# EAGLE board CT_schematic (EAGLE 7.6.0)

Size 184.61 x 80 mm. Coordinates in mm from the lower left corner, seen from the top.
Outline: 84.61,0 184.61,0 184.61,80 84.61,80 84.61,0
Copper layers (1*16): Top 0.035mm / dielectric 1.5mm / Bottom 0.035mm
Design rules "default": minimum track width 10mil, minimum drill 24mil, track to track 8mil, track to pad 8mil, pad to pad 8mil, via to via 8mil, smd to smd 8mil, copper to edge 40mil, drill to drill 8mil, minimum pad ring 10mil, minimum via ring 8mil, stop-mask expansion 4mil, vias tented up to drill 0mil, thermal gap 10mil

## Footprints (pad centres in the part's own frame; a part is rotated, then mirrored left to right if it is on the bottom)
C0402 = smd 0.5 x 0.5: 1 -0.508,0; 2 0.508,0
C0603 = smd 0.8 x 0.8: 1 -0.762,0; 2 0.762,0
C0805 = smd 1.2 x 1.3: 1 -1.016,0; 2 1.016,0
C1210 = smd 1.2 x 2.5: 1 -1.524,0; 2 1.524,0
C1206 = smd 1.3 x 1.6: 1 -1.524,0; 2 1.524,0
R0603 = smd 0.8 x 0.8: 1 -0.762,0; 2 0.762,0
2220 = smd 1.85 x 5.5: 1 -2.55,0; 2 2.55,0
EXV-9H = smd 3.505 x 1.676: 1 -2.857,0; 2 2.857,0
IND_PM3316 = smd 2.921 x 2.794: 1 -5.144,0; 2 5.144,0
DR1040 = smd 1.6 x 3.2: 1 -4.458,0; 2 4.458,0
WE-HCI_7030/7040/7050 = smd 2.5 x 3: 1 -2.45,0; 2 2.45,0
PJ-037B_PACKAGE = drill 3.7 square: 1 12,0 | drill 3.2 square: 2 6,0
BFBGA-684 = smd 0.533 x 0.533: A1 -10.8,10.8; A2 -10,10.8; A3 -9.2,10.8; A4 -8.4,10.8; A5 -7.6,10.8; A6 -6.8,10.8; A7 -6,10.8; A8 -5.2,10.8; A9 -4.4,10.8; A10 -3.6,10.8; A11 -2.8,10.8; A12 -2,10.8; A13 -1.2,10.8; A14 -0.4,10.8; A15 0.4,10.8; A16 1.2,10.8; A17 2,10.8; A18 2.8,10.8; A19 3.6,10.8; A20 4.4,10.8; A21 5.2,10.8; A22 6,10.8; A23 6.8,10.8; A24 7.6,10.8; A25 8.4,10.8; A26 9.2,10.8; A27 10,10.8; A28 10.8,10.8; AA1 -10.8,-5.2; AA2 -10,-5.2; AA3 -9.2,-5.2; AA4 -8.4,-5.2; AA5 -7.6,-5.2; AA6 -6.8,-5.2; AA7 -6,-5.2; AA8 -5.2,-5.2; AA9 -4.4,-5.2; AA10 -3.6,-5.2; AA11 -2.8,-5.2; AA12 -2,-5.2; AA13 -1.2,-5.2; AA14 -0.4,-5.2; AA15 0.4,-5.2; AA16 1.2,-5.2; AA17 2,-5.2; AA18 2.8,-5.2; AA19 3.6,-5.2; AA20 4.4,-5.2; AA21 5.2,-5.2; AA22 6,-5.2; AA23 6.8,-5.2; AA24 7.6,-5.2; AA25 8.4,-5.2; AA26 9.2,-5.2; AA27 10,-5.2; AA28 10.8,-5.2; AB1 -10.8,-6; AB2 -10,-6; AB6 -6.8,-6; AB8 -5.2,-6; AB9 -4.4,-6; AB10 -3.6,-6; AB11 -2.8,-6; AB12 -2,-6; AB13 -1.2,-6; AB14 -0.4,-6; AB15 0.4,-6; AB16 1.2,-6; AB17 2,-6; AB18 2.8,-6; AB19 3.6,-6; AB20 4.4,-6; AB21 5.2,-6; AB23 6.8,-6; AB27 10,-6; AB28 10.8,-6; AC1 -10.8,-6.8; AC2 -10,-6.8; AC3 -9.2,-6.8; AC4 -8.4,-6.8; AC5 -7.6,-6.8; AC7 -6,-6.8; AC8 -5.2,-6.8; AC9 -4.4,-6.8; AC10 -3.6,-6.8; AC11 -2.8,-6.8; AC12 -2,-6.8; AC13 -1.2,-6.8; AC14 -0.4,-6.8; AC15 0.4,-6.8; AC16 1.2,-6.8; AC17 2,-6.8; AC18 2.8,-6.8; AC19 3.6,-6.8; AC20 4.4,-6.8; AC21 5.2,-6.8; AC22 6,-6.8; AC24 7.6,-6.8; AC25 8.4,-6.8; AC26 9.2,-6.8; AC27 10,-6.8; AC28 10.8,-6.8; AD1 -10.8,-7.6; AD2 -10,-7.6; AD3 -9.2,-7.6; AD4 -8.4,-7.6; AD6 -6.8,-7.6; AD8 -5.2,-7.6; AD9 -4.4,-7.6; AD11 -2.8,-7.6; AD12 -2,-7.6; AD14 -0.4,-7.6; AD15 0.4,-7.6; AD17 2,-7.6; AD18 2.8,-7.6; AD20 4.4,-7.6; AD21 5.2,-7.6; AD23 6.8,-7.6; AD25 8.4,-7.6; AD26 9.2,-7.6; AD27 10,-7.6; AD28 10.8,-7.6; AE1 -10.8,-8.4; AE2 -10,-8.4; AE3 -9.2,-8.4; AE5 -7.6,-8.4; AE6 -6.8,-8.4; AE8 -5.2,-8.4; AE9 -4.4,-8.4; AE11 -2.8,-8.4; AE12 -2,-8.4; AE14 -0.4,-8.4; AE15 0.4,-8.4; AE17 2,-8.4; AE18 2.8,-8.4; AE20 4.4,-8.4; AE21 5.2,-8.4; AE23 6.8,-8.4; AE24 7.6,-8.4; AE26 9.2,-8.4; AE27 10,-8.4; AE28 10.8,-8.4; AF1 -10.8,-9.2; AF2 -10,-9.2; AF3 -9.2,-9.2; AF4 -8.4,-9.2; AF5 -7.6,-9.2; AF6 -6.8,-9.2; AF8 -5.2,-9.2; AF9 -4.4,-9.2; AF11 -2.8,-9.2; AF12 -2,-9.2; AF14 -0.4,-9.2; AF15 0.4,-9.2; AF17 2,-9.2; AF18 2.8,-9.2; AF20 4.4,-9.2; AF21 5.2,-9.2; AF23 6.8,-9.2; AF24 7.6,-9.2; AF25 8.4,-9.2; AF26 9.2,-9.2; AF27 10,-9.2; AF28 10.8,-9.2; AG1 -10.8,-10; AG2 -10,-10; AG3 -9.2,-10; AG4 -8.4,-10; AG5 -7.6,-10; AG6 -6.8,-10; AG7 -6,-10; AG8 -5.2,-10; AG9 -4.4,-10; AG10 -3.6,-10; AG11 -2.8,-10; AG12 -2,-10; AG13 -1.2,-10; AG14 -0.4,-10; AG15 0.4,-10; AG16 1.2,-10; AG17 2,-10; AG18 2.8,-10; AG19 3.6,-10; AG20 4.4,-10; AG21 5.2,-10; AG22 6,-10; AG23 6.8,-10; AG24 7.6,-10; AG25 8.4,-10; AG26 9.2,-10; AG27 10,-10; AG28 10.8,-10; AH1 -10.8,-10.8; AH2 -10,-10.8; AH3 -9.2,-10.8; AH4 -8.4,-10.8; AH5 -7.6,-10.8; AH6 -6.8,-10.8; AH7 -6,-10.8; AH8 -5.2,-10.8; AH9 -4.4,-10.8; AH10 -3.6,-10.8; AH11 -2.8,-10.8; AH12 -2,-10.8; AH13 -1.2,-10.8; AH14 -0.4,-10.8; AH15 0.4,-10.8; AH16 1.2,-10.8; AH17 2,-10.8; AH18 2.8,-10.8; AH19 3.6,-10.8; AH20 4.4,-10.8; AH21 5.2,-10.8; AH22 6,-10.8; AH23 6.8,-10.8; AH24 7.6,-10.8; AH25 8.4,-10.8; AH26 9.2,-10.8; AH27 10,-10.8; AH28 10.8,-10.8; B1 -10.8,10; B2 -10,10; B3 -9.2,10; B4 -8.4,10; B5 -7.6,10; B6 -6.8,10; B7 -6,10; B8 -5.2,10; B9 -4.4,10; B10 -3.6,10; B11 -2.8,10; B12 -2,10; B13 -1.2,10; B14 -0.4,10; B15 0.4,10; B16 1.2,10; B17 2,10; B18 2.8,10; B19 3.6,10; B20 4.4,10; B21 5.2,10; B22 6,10; B23 6.8,10; B24 7.6,10; B25 8.4,10; B26 9.2,10; B27 10,10; B28 10.8,10; C1 -10.8,9.2; C2 -10,9.2; C3 -9.2,9.2; C4 -8.4,9.2; C5 -7.6,9.2; C6 -6.8,9.2; C8 -5.2,9.2; C9 -4.4,9.2; C11 -2.8,9.2; C12 -2,9.2; C14 -0.4,9.2; C15 0.4,9.2; C17 2,9.2; C18 2.8,9.2; C20 4.4,9.2; C21 5.2,9.2; C23 6.8,9.2; C24 7.6,9.2; C25 8.4,9.2; C26 9.2,9.2; C27 10,9.2; C28 10.8,9.2; D1 -10.8,8.4; D2 -10,8.4; D3 -9.2,8.4; D5 -7.6,8.4; D6 -6.8,8.4; D8 -5.2,8.4; D9 -4.4,8.4; D11 -2.8,8.4; D12 -2,8.4; D14 -0.4,8.4; D15 0.4,8.4; D17 2,8.4; D18 2.8,8.4; D20 4.4,8.4; D21 5.2,8.4; D23 6.8,8.4; D24 7.6,8.4; D26 9.2,8.4; D27 10,8.4; D28 10.8,8.4; E1 -10.8,7.6; E2 -10,7.6; E3 -9.2,7.6; E4 -8.4,7.6; E6 -6.8,7.6; E8 -5.2,7.6; E9 -4.4,7.6; E11 -2.8,7.6; E12 -2,7.6; E14 -0.4,7.6; E15 0.4,7.6; E17 2,7.6; E18 2.8,7.6; E20 4.4,7.6; E21 5.2,7.6; E23 6.8,7.6; E25 8.4,7.6; E26 9.2,7.6; E27 10,7.6; E28 10.8,7.6; F1 -10.8,6.8; F2 -10,6.8; F3 -9.2,6.8; F4 -8.4,6.8; F5 -7.6,6.8; F7 -6,6.8; F8 -5.2,6.8; F9 -4.4,6.8; F10 -3.6,6.8; F11 -2.8,6.8; F12 -2,6.8; F13 -1.2,6.8; F14 -0.4,6.8; F15 0.4,6.8; F16 1.2,6.8; F17 2,6.8; F18 2.8,6.8; F19 3.6,6.8; F20 4.4,6.8; F21 5.2,6.8; F22 6,6.8; F24 7.6,6.8; F25 8.4,6.8; F26 9.2,6.8; F27 10,6.8; F28 10.8,6.8; G1 -10.8,6; G2 -10,6; G6 -6.8,6; G8 -5.2,6; G9 -4.4,6; G10 -3.6,6; G11 -2.8,6; G12 -2,6; G13 -1.2,6; G14 -0.4,6; G15 0.4,6; G16 1.2,6; G17 2,6; G18 2.8,6; G19 3.6,6; G20 4.4,6; G21 5.2,6; G23 6.8,6; G27 10,6; G28 10.8,6; H1 -10.8,5.2; H2 -10,5.2; H3 -9.2,5.2; H4 -8.4,5.2; H5 -7.6,5.2; H6 -6.8,5.2; H7 -6,5.2; H8 -5.2,5.2; H9 -4.4,5.2; H10 -3.6,5.2; H11 -2.8,5.2; H12 -2,5.2; H13 -1.2,5.2; H14 -0.4,5.2; H15 0.4,5.2; H16 1.2,5.2; H17 2,5.2; H18 2.8,5.2; H19 3.6,5.2; H20 4.4,5.2; H21 5.2,5.2; H22 6,5.2; H23 6.8,5.2; H24 7.6,5.2; H25 8.4,5.2; H26 9.2,5.2; H27 10,5.2; H28 10.8,5.2; J1 -10.8,4.4; J2 -10,4.4; J3 -9.2,4.4; J4 -8.4,4.4; J5 -7.6,4.4; J6 -6.8,4.4; J7 -6,4.4; J10 -3.6,4.4; J11 -2.8,4.4; J12 -2,4.4; J13 -1.2,4.4; J14 -0.4,4.4; J15 0.4,4.4; J16 1.2,4.4; J17 2,4.4; J18 2.8,4.4; J19 3.6,4.4; J22 6,4.4; J23 6.8,4.4; J24 7.6,4.4; J25 8.4,4.4; J26 9.2,4.4; J27 10,4.4; J28 10.8,4.4; K1 -10.8,3.6; K2 -10,3.6; K6 -6.8,3.6; K7 -6,3.6; K9 -4.4,3.6; K10 -3.6,3.6; K11 -2.8,3.6; K12 -2,3.6; K13 -1.2,3.6; K14 -0.4,3.6; K15 0.4,3.6; K16 1.2,3.6; K17 2,3.6; K18 2.8,3.6; K19 3.6,3.6; K20 4.4,3.6; K22 6,3.6; K23 6.8,3.6; K27 10,3.6; K28 10.8,3.6; L1 -10.8,2.8; L2 -10,2.8; L3 -9.2,2.8; L4 -8.4,2.8; L5 -7.6,2.8; L6 -6.8,2.8; L7 -6,2.8; L8 -5.2,2.8; L9 -4.4,2.8; L10 -3.6,2.8; L11 -2.8,2.8; L12 -2,2.8; L13 -1.2,2.8; L14 -0.4,2.8; L15 0.4,2.8; L16 1.2,2.8; L17 2,2.8; L18 2.8,2.8; L19 3.6,2.8; L20 4.4,2.8; L21 5.2,2.8; L22 6,2.8; L23 6.8,2.8; L24 7.6,2.8; L25 8.4,2.8; L26 9.2,2.8; L27 10,2.8; L28 10.8,2.8; M1 -10.8,2; M2 -10,2; M3 -9.2,2; M4 -8.4,2; M5 -7.6,2; M6 -6.8,2; M7 -6,2; M8 -5.2,2; M9 -4.4,2; M10 -3.6,2; M11 -2.8,2; M12 -2,2; M13 -1.2,2; M14 -0.4,2; M15 0.4,2; M16 1.2,2; M17 2,2; M18 2.8,2; M19 3.6,2; M20 4.4,2; M21 5.2,2; M22 6,2; M23 6.8,2; M24 7.6,2; M25 8.4,2; M26 9.2,2; M27 10,2; M28 10.8,2; N1 -10.8,1.2; N2 -10,1.2; N6 -6.8,1.2; N7 -6,1.2; N8 -5.2,1.2; N9 -4.4,1.2; N10 -3.6,1.2; N11 -2.8,1.2; N12 -2,1.2; N13 -1.2,1.2; N14 -0.4,1.2; N15 0.4,1.2; N16 1.2,1.2; N17 2,1.2; N18 2.8,1.2; N19 3.6,1.2; N20 4.4,1.2; N21 5.2,1.2; N22 6,1.2; N23 6.8,1.2; N27 10,1.2; N28 10.8,1.2; P1 -10.8,0.4; P2 -10,0.4; P3 -9.2,0.4; P4 -8.4,0.4; P5 -7.6,0.4; P6 -6.8,0.4; P7 -6,0.4; P8 -5.2,0.4; P9 -4.4,0.4; P10 -3.6,0.4; P11 -2.8,0.4; P12 -2,0.4; P13 -1.2,0.4; P14 -0.4,0.4; P15 0.4,0.4; P16 1.2,0.4; P17 2,0.4; P18 2.8,0.4; P19 3.6,0.4; P20 4.4,0.4; P21 5.2,0.4; P22 6,0.4; P23 6.8,0.4; P24 7.6,0.4; P25 8.4,0.4; P26 9.2,0.4; P27 10,0.4; P28 10.8,0.4; R1 -10.8,-0.4; R2 -10,-0.4; R3 -9.2,-0.4; R4 -8.4,-0.4; R5 -7.6,-0.4; R6 -6.8,-0.4; R7 -6,-0.4; R8 -5.2,-0.4; R9 -4.4,-0.4; R10 -3.6,-0.4; R11 -2.8,-0.4; R12 -2,-0.4; R13 -1.2,-0.4; R14 -0.4,-0.4; R15 0.4,-0.4; R16 1.2,-0.4; R17 2,-0.4; R18 2.8,-0.4; R19 3.6,-0.4; R20 4.4,-0.4; R21 5.2,-0.4; R22 6,-0.4; R23 6.8,-0.4; R24 7.6,-0.4; R25 8.4,-0.4; R26 9.2,-0.4; R27 10,-0.4; R28 10.8,-0.4; T1 -10.8,-1.2; T2 -10,-1.2; T6 -6.8,-1.2; T7 -6,-1.2; T8 -5.2,-1.2; T9 -4.4,-1.2; T10 -3.6,-1.2; T11 -2.8,-1.2; T12 -2,-1.2; T13 -1.2,-1.2; T14 -0.4,-1.2; T15 0.4,-1.2; T16 1.2,-1.2; T17 2,-1.2; T18 2.8,-1.2; T19 3.6,-1.2; T20 4.4,-1.2; T21 5.2,-1.2; T22 6,-1.2; T23 6.8,-1.2; T27 10,-1.2; T28 10.8,-1.2; U1 -10.8,-2; U2 -10,-2; U3 -9.2,-2; U4 -8.4,-2; U5 -7.6,-2; U6 -6.8,-2; U7 -6,-2; U8 -5.2,-2; U9 -4.4,-2; U10 -3.6,-2; U11 -2.8,-2; U12 -2,-2; U13 -1.2,-2; U14 -0.4,-2; U15 0.4,-2; U16 1.2,-2; U17 2,-2; U18 2.8,-2; U19 3.6,-2; U20 4.4,-2; U21 5.2,-2; U22 6,-2; U23 6.8,-2; U24 7.6,-2; U25 8.4,-2; U26 9.2,-2; U27 10,-2; U28 10.8,-2; V1 -10.8,-2.8; V2 -10,-2.8; V3 -9.2,-2.8; V4 -8.4,-2.8; V5 -7.6,-2.8; V6 -6.8,-2.8; V7 -6,-2.8; V8 -5.2,-2.8; V9 -4.4,-2.8; V10 -3.6,-2.8; V11 -2.8,-2.8; V12 -2,-2.8; V13 -1.2,-2.8; V14 -0.4,-2.8; V15 0.4,-2.8; V16 1.2,-2.8; V17 2,-2.8; V18 2.8,-2.8; V19 3.6,-2.8; V20 4.4,-2.8; V21 5.2,-2.8; V22 6,-2.8; V23 6.8,-2.8; V24 7.6,-2.8; V25 8.4,-2.8; V26 9.2,-2.8; V27 10,-2.8; V28 10.8,-2.8; W1 -10.8,-3.6; W2 -10,-3.6; W6 -6.8,-3.6; W7 -6,-3.6; W9 -4.4,-3.6; W10 -3.6,-3.6; W11 -2.8,-3.6; W12 -2,-3.6; W13 -1.2,-3.6; W14 -0.4,-3.6; W15 0.4,-3.6; W16 1.2,-3.6; W17 2,-3.6; W18 2.8,-3.6; W19 3.6,-3.6; W20 4.4,-3.6; W22 6,-3.6; W23 6.8,-3.6; W27 10,-3.6; W28 10.8,-3.6; Y1 -10.8,-4.4; Y2 -10,-4.4; Y3 -9.2,-4.4; Y4 -8.4,-4.4; Y5 -7.6,-4.4; Y6 -6.8,-4.4; Y7 -6,-4.4; Y10 -3.6,-4.4; Y11 -2.8,-4.4; Y12 -2,-4.4; Y13 -1.2,-4.4; Y14 -0.4,-4.4; Y15 0.4,-4.4; Y16 1.2,-4.4; Y17 2,-4.4; Y18 2.8,-4.4; Y19 3.6,-4.4; Y22 6,-4.4; Y23 6.8,-4.4; Y24 7.6,-4.4; Y25 8.4,-4.4; Y26 9.2,-4.4; Y27 10,-4.4; Y28 10.8,-4.4
MD-40S = drill 1 pad 1.8 square: 1 -6.8,0 | drill 1 pad 1.8: 2 0,0; 3 -6.8,-2.5; 4 0,-2.5 | drill 2.2: 5 -3.4,3.8
SOIC-8 = smd 1.6 x 0.6: 1 -2.7,1.905 | smd 1.55 x 0.6: 2 -2.7,0.635; 3 -2.7,-0.635; 4 -2.7,-1.905; 5 2.7,-1.905; 6 2.7,-0.635; 7 2.7,0.635; 8 2.7,1.905
VFQFPN48 = smd 0.55 x 0.3: 1 -3.38,2.75; 2 -3.38,2.25; 3 -3.38,1.75; 4 -3.38,1.25; 5 -3.38,0.75; 6 -3.38,0.25; 7 -3.38,-0.25; 8 -3.38,-0.75; 9 -3.38,-1.25; 10 -3.38,-1.75; 11 -3.38,-2.25; 12 -3.38,-2.75; 25 3.38,-2.75; 26 3.38,-2.25; 27 3.38,-1.75; 28 3.38,-1.25; 29 3.38,-0.75; 30 3.38,-0.25; 31 3.38,0.25; 32 3.38,0.75; 33 3.38,1.25; 34 3.38,1.75; 35 3.38,2.25; 36 3.38,2.75 | smd 0.3 x 0.55: 13 -2.75,-3.38; 14 -2.25,-3.38; 15 -1.75,-3.38; 16 -1.25,-3.38; 17 -0.75,-3.38; 18 -0.25,-3.38; 19 0.25,-3.38; 20 0.75,-3.38; 21 1.25,-3.38; 22 1.75,-3.38; 23 2.25,-3.38; 24 2.75,-3.38; 37 2.75,3.38; 38 2.25,3.38; 39 1.75,3.38; 40 1.25,3.38; 41 0.75,3.38; 42 0.25,3.38; 43 -0.25,3.38; 44 -0.75,3.38; 45 -1.25,3.38; 46 -1.75,3.38; 47 -2.25,3.38; 48 -2.75,3.38 | smd 5.6 x 5.6: EXP 0,0
7499511611A = drill 0.9: 1 -5.075,-15.24; 2 -3.045,-15.24; 3 -1.015,-15.24; 4 1.015,-15.24; 5 3.045,-15.24; 6 5.075,-15.24; 7 -6.09,-17.78; 8 -4.06,-17.78; 9 -2.03,-17.78; 10 2.03,-17.78; 11 4.06,-17.78; 12 6.09,-17.78; 13 -5.59,-8.12; 14 5.59,-8.12; 15 -5.59,-6.66; 16 5.59,-6.66 | drill 1.02: 17 -6.095,-20.32; 18 -3.555,-20.32; 19 3.555,-20.32; 20 6.095,-20.32 | drill 1.57: Z1 -8.065,3.18; Z2 8.065,3.18 | hole 3: -6.35,0; 6.35,0
QFN-32 = smd 0.6 x 0.3: 1 -2.3,1.75; 2 -2.3,1.25; 3 -2.3,0.75; 4 -2.3,0.25; 5 -2.3,-0.25; 6 -2.3,-0.75; 7 -2.3,-1.25; 8 -2.3,-1.75; 17 2.3,-1.75; 18 2.3,-1.25; 19 2.3,-0.75; 20 2.3,-0.25; 21 2.3,0.25; 22 2.3,0.75; 23 2.3,1.25; 24 2.3,1.75 | smd 0.3 x 0.6: 9 -1.75,-2.3; 10 -1.25,-2.3; 11 -0.75,-2.3; 12 -0.25,-2.3; 13 0.25,-2.3; 14 0.75,-2.3; 15 1.25,-2.3; 16 1.75,-2.3; 25 1.75,2.3; 26 1.25,2.3; 27 0.75,2.3; 28 0.25,2.3; 29 -0.25,2.3; 30 -0.75,2.3; 31 -1.25,2.3; 32 -1.75,2.3 | smd 3.2 x 3.2: EXP 0,0
7498011122R = smd 0.71 x 2.29: 1 -3.545,-3.18; 2 -2.525,-3.18; 3 -1.505,-3.18; 4 -0.485,-3.18; 5 0.535,-3.18; 6 1.555,-3.18; 8 3.595,-3.18; 9 5.635,-3.18; 10 6.655,-3.18; 11 -6.605,-3.18; 12 -5.585,-3.18 | smd 1.4 x 2.54: 13 -8.51,10.2; 14 8.51,10.2 | hole 1.4: -3.5,0; 3.5,0
QFN-28 = smd 0.813 x 0.305: 1 -2.451,1.5; 2 -2.451,1; 3 -2.451,0.5; 4 -2.451,0; 5 -2.451,-0.5; 6 -2.451,-1; 7 -2.451,-1.5; 15 2.451,-1.5; 16 2.451,-1; 17 2.451,-0.5; 18 2.451,0; 19 2.451,0.5; 20 2.451,1; 21 2.451,1.5 | smd 0.305 x 0.813: 8 -1.5,-2.451; 9 -1,-2.451; 10 -0.5,-2.451; 11 0,-2.451; 12 0.5,-2.451; 13 1,-2.451; 14 1.5,-2.451; 22 1.5,2.451; 23 1,2.451; 24 0.5,2.451; 25 0,2.451; 26 -0.5,2.451; 27 -1,2.451; 28 -1.5,2.451 | smd 3.607 x 3.607: 29 0,0
SJ-43515TS-SMT-TR = smd 2.2 x 3: 1 0.6,-7.4; 4 3.4,-7.4 | smd 3 x 3: 2 12.8,-7.4; 5 17,-3 | smd 2 x 3: 3 5.3,0; 6 2.5,0 | drill 1.8: P$7 4.5,-3.69; P$8 11.54,-3.69
ABLS-20.000MHZ-B4-T = smd 5.6 x 2.8: 1 -3.81,0; 2 5.69,0
ABLS-25.000MHZ-B2F-T = smd 5.6 x 2.8: 1 -3.81,0; 2 5.69,0
ASFL1 = smd 1.7 x 1.5: 1 -1.27,-1.1; 2 1.27,-1.1; 3 1.27,1.1; 4 -1.27,1.1
HTSSOP14 = smd 1.676 x 0.356: 1 -2.8,1.95; 2 -2.8,1.3; 3 -2.8,0.65; 4 -2.8,0; 5 -2.8,-0.65; 6 -2.8,-1.3; 7 -2.8,-1.95; 8 2.8,-1.95; 9 2.8,-1.3; 10 2.8,-0.65; 11 2.8,0; 12 2.8,0.65; 13 2.8,1.3; 14 2.8,1.95 | smd 3 x 5: 15 0,0 | drill 0.4 pad 0.45: P$1 -0.75,1.5; P$2 0.75,1.5; P$3 -0.75,0; P$4 0.8,0; P$5 -0.75,-1.5; P$6 0.9,-1.5
WSON-8 = smd 0.3 x 0.6: 1 -0.75,0; 2 0.05,0; 3 0.85,0; 4 1.65,0; 5 1.65,3.8; 6 0.85,3.8; 7 0.05,3.8; 8 -0.75,3.8 | smd 3 x 2.6: PAD 0.45,1.9
QFN-16_EP = smd 0.805 x 0.3: 1 -1.452,0.75; 2 -1.452,0.25; 3 -1.452,-0.25; 4 -1.452,-0.75; 9 1.452,-0.75; 10 1.452,-0.25; 11 1.452,0.25; 12 1.452,0.75 | smd 0.3 x 0.805: 5 -0.75,-1.452; 6 -0.25,-1.452; 7 0.25,-1.452; 8 0.75,-1.452; 13 0.75,1.452; 14 0.25,1.452; 15 -0.25,1.452; 16 -0.75,1.452 | smd 1.55 x 1.55: 17 0,0
QFN-38_UHF = smd 0.75 x 0.3: 1 -2.4,2.75; 2 -2.4,2.25; 3 -2.4,1.75; 4 -2.4,1.25; 6 -2.4,0.25; 7 -2.4,-0.25; 8 -2.4,-0.75; 9 -2.4,-1.25; 10 -2.4,-1.75; 11 -2.4,-2.25; 12 -2.4,-2.75; 20 2.4,-2.75; 21 2.4,-2.25; 22 2.4,-1.75; 23 2.4,-1.25; 24 2.4,-0.75; 25 2.4,-0.25; 26 2.4,0.25; 27 2.4,0.75; 28 2.4,1.25; 29 2.4,1.75; 30 2.4,2.25; 31 2.4,2.75 | smd 0.758 x 0.3: 5 -2.4,0.75 | smd 0.3 x 0.75: 13 -1.5,-3.4; 14 -1,-3.4; 15 -0.5,-3.4; 16 0,-3.4; 17 0.5,-3.4; 18 1,-3.4; 19 1.5,-3.4; 32 1.5,3.4; 33 1,3.4; 34 0.5,3.4; 35 0,3.4; 36 -0.5,3.4; 37 -1,3.4; 38 -1.5,3.4 | smd 3.2 x 5.2: 39 0,0
IRF8306MTRPBF = smd 0.9 x 1.85: 1 0,0; 2 0,-2.35; 6 6.4,0; 7 6.4,-2.35 | smd 0.75 x 0.75: 3 1.75,-1.175 | smd 1.45 x 0.87: 4 3.5,-0.565; 5 3.5,-1.785
SW_4-1437565-2 = smd 1.4 x 2.1: 1 -2.23,4.55; 2 -2.23,-4.55; 3 2.23,4.55; 4 2.23,-4.55
LGM67K-G1J2-24-Z = smd 0.8 x 1.4: A -2,0; C 0,0
NC7SZ125M5X = smd 1.3 x 0.7: 1 -1.3,0.95; 2 -1.3,0; 3 -1.3,-0.95; 4 1.3,-0.95; 5 1.3,0.95

## Placement (x,y rotation side)
C1  1.2e-11  [C0402]  -30.96,123.19 0 top  (outside the outline)
C2  1.2e-11  [C0402]  -34.77,123.19 0 top  (outside the outline)
C3  1.2e-11  [C0402]  -38.58,123.19 0 top  (outside the outline)
C4  1.2e-11  [C0402]  -42.39,123.19 0 top  (outside the outline)
C5  1e-07  [C0402]  31.27,138.43 0 top  (outside the outline)
C6  1e-07  [C0402]  27.46,138.43 0 top  (outside the outline)
C7  1e-07  [C0402]  23.65,138.43 0 top  (outside the outline)
C8  1e-07  [C0402]  19.84,138.43 0 top  (outside the outline)
C9  1e-06  [C0603]  27.46,113.03 0 top  (outside the outline)
C10  1e-06  [C0603]  23.65,113.03 0 top  (outside the outline)
C11  1e-06  [C0603]  19.84,113.03 0 top  (outside the outline)
C12  1e-06  [C0603]  16.03,113.03 0 top  (outside the outline)
C13  1e-06  [C0603]  12.22,113.03 0 top  (outside the outline)
C14  1e-06  [C0603]  8.41,113.03 0 top  (outside the outline)
C15  1e-06  [C0603]  4.6,113.03 0 top  (outside the outline)
C16  1e-06  [C0603]  0.79,113.03 0 top  (outside the outline)
C17  1e-06  [C0603]  -3.02,113.03 0 top  (outside the outline)
C18  1e-06  [C0603]  -6.83,113.03 0 top  (outside the outline)
C19  1e-06  [C0603]  -10.64,113.03 0 top  (outside the outline)
C20  1e-05  [C0805]  63.02,91.44 0 top  (outside the outline)
C21  1e-07  [C0402]  16.03,138.43 0 top  (outside the outline)
C22  1e-07  [C0402]  12.22,138.43 0 top  (outside the outline)
C23  1e-07  [C0402]  8.41,138.43 0 top  (outside the outline)
C24  1e-07  [C0402]  4.6,138.43 0 top  (outside the outline)
C25  1e-07  [C0402]  0.79,138.43 0 top  (outside the outline)
C26  1e-07  [C0402]  -3.02,138.43 0 top  (outside the outline)
C27  1e-07  [C0402]  -6.83,138.43 0 top  (outside the outline)
C28  1e-07  [C0402]  -10.64,138.43 0 top  (outside the outline)
C29  1e-07  [C0402]  -14.45,138.43 0 top  (outside the outline)
C30  1e-07  [C0402]  -18.26,138.43 0 top  (outside the outline)
C31  1e-08  [C0402]  -22.07,138.43 0 top  (outside the outline)
C32  1e-08  [C0402]  -25.88,138.43 0 top  (outside the outline)
C33  1e-08  [C0402]  -29.69,138.43 0 top  (outside the outline)
C34  1e-08  [C0402]  -33.5,138.43 0 top  (outside the outline)
C35  1e-08  [C0402]  -37.31,138.43 0 top  (outside the outline)
C36  1e-08  [C0402]  -41.12,138.43 0 top  (outside the outline)
C37  1e-08  [C0402]  -44.93,138.43 0 top  (outside the outline)
C38  1e-08  [C0402]  69.37,143.51 0 top  (outside the outline)
C39  1e-08  [C0402]  65.56,143.51 0 top  (outside the outline)
C40  1e-08  [C0402]  61.75,143.51 0 top  (outside the outline)
C41  1e-05  [C0805]  57.94,91.44 0 top  (outside the outline)
C42  1e-07  [C0402]  57.94,143.51 0 top  (outside the outline)
C43  1e-07  [C0402]  54.13,143.51 0 top  (outside the outline)
C44  1e-07  [C0402]  50.32,143.51 0 top  (outside the outline)
C45  1e-07  [C0402]  46.51,143.51 0 top  (outside the outline)
C46  1e-07  [C0402]  42.7,143.51 0 top  (outside the outline)
C47  1e-07  [C0402]  38.89,143.51 0 top  (outside the outline)
C48  1e-07  [C0402]  35.08,143.51 0 top  (outside the outline)
C49  1e-07  [C0402]  31.27,143.51 0 top  (outside the outline)
C50  1e-07  [C0402]  27.46,143.51 0 top  (outside the outline)
C51  1e-07  [C0402]  23.65,143.51 0 top  (outside the outline)
C52  1e-07  [C0402]  19.84,143.51 0 top  (outside the outline)
C53  1e-07  [C0402]  16.03,143.51 0 top  (outside the outline)
C54  1e-07  [C0402]  12.22,143.51 0 top  (outside the outline)
C55  1e-07  [C0402]  8.41,143.51 0 top  (outside the outline)
C56  1e-07  [C0402]  4.6,143.51 0 top  (outside the outline)
C57  1e-07  [C0402]  0.79,143.51 0 top  (outside the outline)
C58  1e-07  [C0402]  -3.02,143.51 0 top  (outside the outline)
C59  1e-07  [C0402]  -6.83,143.51 0 top  (outside the outline)
C60  1e-07  [C0402]  -10.64,143.51 0 top  (outside the outline)
C61  1e-07  [C0402]  -14.45,143.51 0 top  (outside the outline)
C62  1e-07  [C0402]  -18.26,143.51 0 top  (outside the outline)
C63  1e-07  [C0402]  -22.07,143.51 0 top  (outside the outline)
C64  1e-05  [C0805]  52.86,91.44 0 top  (outside the outline)
C65  1e-07  [C0402]  -25.88,143.51 0 top  (outside the outline)
C66  1e-07  [C0402]  -29.69,143.51 0 top  (outside the outline)
C67  1e-07  [C0402]  -33.5,143.51 0 top  (outside the outline)
C68  1e-07  [C0402]  -37.31,143.51 0 top  (outside the outline)
C69  1e-07  [C0402]  -41.12,143.51 0 top  (outside the outline)
C70  1e-07  [C0402]  -44.93,143.51 0 top  (outside the outline)
C71  1e-07  [C0402]  69.37,148.59 0 top  (outside the outline)
C72  1e-05  [C0805]  47.78,91.44 0 top  (outside the outline)
C73  1e-07  [C0402]  65.56,148.59 0 top  (outside the outline)
C74  1e-07  [C0402]  61.75,148.59 0 top  (outside the outline)
C75  1e-07  [C0402]  57.94,148.59 0 top  (outside the outline)
C76  1e-07  [C0402]  54.13,148.59 0 top  (outside the outline)
C77  1e-07  [C0402]  50.32,148.59 0 top  (outside the outline)
C78  1e-07  [C0402]  46.51,148.59 0 top  (outside the outline)
C79  1e-07  [C0402]  42.7,148.59 0 top  (outside the outline)
C80  1e-07  [C0402]  38.89,148.59 0 top  (outside the outline)
C81  1e-05  [C0805]  42.7,91.44 0 top  (outside the outline)
C82  1e-07  [C0402]  35.08,148.59 0 top  (outside the outline)
C83  1e-07  [C0402]  31.27,148.59 0 top  (outside the outline)
C84  1e-07  [C0402]  27.46,148.59 0 top  (outside the outline)
C85  1e-07  [C0402]  23.65,148.59 0 top  (outside the outline)
C86  1e-07  [C0402]  19.84,148.59 0 top  (outside the outline)
C87  1e-05  [C0805]  37.62,91.44 0 top  (outside the outline)
C88  1e-08  [C0402]  16.03,148.59 0 top  (outside the outline)
C89  1e-08  [C0402]  12.22,148.59 0 top  (outside the outline)
C90  1e-08  [C0402]  8.41,148.59 0 top  (outside the outline)
C91  1e-08  [C0402]  4.6,148.59 0 top  (outside the outline)
C92  1e-08  [C0402]  0.79,148.59 0 top  (outside the outline)
C93  1e-08  [C0402]  -3.02,148.59 0 top  (outside the outline)
C94  1e-08  [C0402]  -6.83,148.59 0 top  (outside the outline)
C95  1e-08  [C0402]  -10.64,148.59 0 top  (outside the outline)
C96  1e-08  [C0402]  -14.45,148.59 0 top  (outside the outline)
C97  1e-08  [C0402]  -18.26,148.59 0 top  (outside the outline)
C98  1e-05  [C0805]  32.54,91.44 0 top  (outside the outline)
C99  1e-08  [C0402]  -22.07,148.59 0 top  (outside the outline)
C100  1e-08  [C0402]  57.94,128.27 0 top  (outside the outline)
C101  1e-08  [C0402]  54.13,128.27 0 top  (outside the outline)
C102  1e-08  [C0402]  50.32,128.27 0 top  (outside the outline)
C103  1e-08  [C0402]  46.51,128.27 0 top  (outside the outline)
C104  1e-08  [C0402]  42.7,128.27 0 top  (outside the outline)
C105  1e-08  [C0402]  38.89,128.27 0 top  (outside the outline)
C106  1e-08  [C0402]  35.08,128.27 0 top  (outside the outline)
C107  1e-08  [C0402]  31.27,128.27 0 top  (outside the outline)
C108  1e-08  [C0402]  27.46,128.27 0 top  (outside the outline)
C109  1e-05  [C0805]  27.46,91.44 0 top  (outside the outline)
C110  1e-08  [C0402]  23.65,128.27 0 top  (outside the outline)
C111  1e-08  [C0402]  19.84,128.27 0 top  (outside the outline)
C112  1e-08  [C0402]  16.03,128.27 0 top  (outside the outline)
C113  1e-08  [C0402]  12.22,128.27 0 top  (outside the outline)
C114  1e-08  [C0402]  8.41,128.27 0 top  (outside the outline)
C115  1e-08  [C0402]  4.6,128.27 0 top  (outside the outline)
C116  1e-08  [C0402]  0.79,128.27 0 top  (outside the outline)
C117  1e-08  [C0402]  -3.02,128.27 0 top  (outside the outline)
C118  1e-08  [C0402]  -6.83,128.27 0 top  (outside the outline)
C119  1e-08  [C0402]  -10.64,128.27 0 top  (outside the outline)
C120  1e-08  [C0402]  -14.45,128.27 0 top  (outside the outline)
C121  1e-08  [C0402]  -18.26,128.27 0 top  (outside the outline)
C122  1e-08  [C0402]  -22.07,128.27 0 top  (outside the outline)
C123  1e-08  [C0402]  -25.88,128.27 0 top  (outside the outline)
C124  1e-08  [C0402]  -29.69,128.27 0 top  (outside the outline)
C125  1e-08  [C0402]  -33.5,128.27 0 top  (outside the outline)
C126  1e-08  [C0402]  -37.31,128.27 0 top  (outside the outline)
C127  1e-08  [C0402]  -41.12,128.27 0 top  (outside the outline)
C128  1e-08  [C0402]  -44.93,128.27 0 top  (outside the outline)
C129  1e-08  [C0402]  69.37,133.35 0 top  (outside the outline)
C130  1e-08  [C0402]  65.56,133.35 0 top  (outside the outline)
C131  1e-08  [C0402]  61.75,133.35 0 top  (outside the outline)
C132  1e-08  [C0402]  57.94,133.35 0 top  (outside the outline)
C133  1e-08  [C0402]  54.13,133.35 0 top  (outside the outline)
C134  1e-08  [C0402]  50.32,133.35 0 top  (outside the outline)
C135  1e-07  [C0402]  46.51,133.35 0 top  (outside the outline)
C136  1e-06  [C0603]  -14.45,113.03 0 top  (outside the outline)
C137  1e-07  [C0402]  42.7,133.35 0 top  (outside the outline)
C138  1e-06  [C0603]  -18.26,113.03 0 top  (outside the outline)
C139  1e-07  [C0402]  38.89,133.35 0 top  (outside the outline)
C140  1e-06  [C0603]  -22.07,113.03 0 top  (outside the outline)
C141  1e-07  [C0402]  35.08,133.35 0 top  (outside the outline)
C142  1e-05  [C0805]  22.38,91.44 0 top  (outside the outline)
C143  1e-08  [C0402]  31.27,133.35 0 top  (outside the outline)
C144  1e-06  [C0603]  -25.88,113.03 0 top  (outside the outline)
C145  1e-07  [C0402]  27.46,133.35 0 top  (outside the outline)
C146  1e-06  [C0603]  -29.69,113.03 0 top  (outside the outline)
C147  1e-07  [C0402]  23.65,133.35 0 top  (outside the outline)
C148  1e-05  [C0805]  17.3,91.44 0 top  (outside the outline)
C149  1e-08  [C0402]  19.84,133.35 0 top  (outside the outline)
C150  1e-06  [C0603]  -33.5,113.03 0 top  (outside the outline)
C151  1e-07  [C0402]  16.03,133.35 0 top  (outside the outline)
C152  1e-06  [C0603]  -37.31,113.03 0 top  (outside the outline)
C153  1e-07  [C0402]  12.22,133.35 0 top  (outside the outline)
C154  1e-06  [C0603]  -41.12,113.03 0 top  (outside the outline)
C155  1e-07  [C0402]  8.41,133.35 0 top  (outside the outline)
C156  1e-06  [C0603]  -44.93,113.03 0 top  (outside the outline)
C157  1e-07  [C0402]  4.6,133.35 0 top  (outside the outline)
C158  1e-05  [C0805]  12.22,91.44 0 top  (outside the outline)
C159  1e-08  [C0402]  0.79,133.35 0 top  (outside the outline)
C160  1e-06  [C0603]  69.37,118.11 0 top  (outside the outline)
C161  1e-07  [C0402]  -3.02,133.35 0 top  (outside the outline)
C162  1e-06  [C0603]  65.56,118.11 0 top  (outside the outline)
C163  1e-07  [C0402]  -6.83,133.35 0 top  (outside the outline)
C164  1e-05  [C0805]  7.14,91.44 0 top  (outside the outline)
C165  1e-08  [C0402]  -10.64,133.35 0 top  (outside the outline)
C166  2.7e-11  [C0402]  -46.2,123.19 0 top  (outside the outline)
C167  2.7e-11  [C0402]  69.37,128.27 0 top  (outside the outline)
C168  2.2e-08  [C0402]  65.56,128.27 0 top  (outside the outline)
C169  1e-06  [C0603]  61.75,118.11 0 top  (outside the outline)
C170  1e-06  [C0603]  57.94,118.11 0 top  (outside the outline)
C171  4.7e-10  [C0603]  35.08,113.03 0 top  (outside the outline)
C172  1e-06  [C0603]  54.13,118.11 0 top  (outside the outline)
C173  1e-08  [C0402]  -14.45,133.35 0 top  (outside the outline)
C174  2.2e-05  [C1210]  37.62,85.09 0 top  (outside the outline)
C175  2.2e-05  [C1210]  31.27,85.09 0 top  (outside the outline)
C176  1e-09  [C0402]  -18.26,133.35 0 top  (outside the outline)
C177  1e-09  [C0402]  -22.07,133.35 0 top  (outside the outline)
C178  1e-07  [C0402]  -25.88,133.35 0 top  (outside the outline)
C179  1e-07  [C0402]  -29.69,133.35 0 top  (outside the outline)
C180  1e-07  [C0402]  -33.5,133.35 0 top  (outside the outline)
C181  1e-07  [C0402]  -37.31,133.35 0 top  (outside the outline)
C182  1e-07  [C0402]  -41.12,133.35 0 top  (outside the outline)
C183  1e-05  [C0805]  2.06,91.44 0 top  (outside the outline)
C184  1e-05  [C0805]  -3.02,91.44 0 top  (outside the outline)
C185  1e-05  [C0805]  -8.1,91.44 0 top  (outside the outline)
C186  1e-05  [C0805]  -13.18,91.44 0 top  (outside the outline)
C187  1e-05  [C0805]  -18.26,91.44 0 top  (outside the outline)
C188  1e-08  [C0402]  -44.93,133.35 0 top  (outside the outline)
C189  1e-06  [C0603]  50.32,118.11 0 top  (outside the outline)
C190  3.3e-09  [C0402]  61.75,128.27 0 top  (outside the outline)
C191  1e-07  [C0402]  69.37,138.43 0 top  (outside the outline)
C192  2.2e-05  [C1210]  24.92,85.09 0 top  (outside the outline)
C193  2.2e-05  [C1210]  18.57,85.09 0 top  (outside the outline)
C194  1e-05  [C1206]  -25.88,85.09 0 top  (outside the outline)
C195  1e-05  [C1206]  -32.23,85.09 0 top  (outside the outline)
C196  8e-07  [R0603]  46.51,118.11 0 top  (outside the outline)
C197  1e-05  [C1210]  12.22,85.09 0 top  (outside the outline)
C198  1e-05  [C0805]  -23.34,91.44 0 top  (outside the outline)
C199  1e-06  [C0603]  42.7,118.11 0 top  (outside the outline)
C200  1e-07  [C0402]  65.56,138.43 0 top  (outside the outline)
C201  6.8e-05  [2220]  52.86,68.58 0 top
C202  1e-05  [C0805]  -28.42,91.44 0 top  (outside the outline)
C203  1e-06  [C0603]  38.89,118.11 0 top  (outside the outline)
C204  1e-07  [C0402]  61.75,138.43 0 top  (outside the outline)
C205  6.8e-05  [2220]  45.24,68.58 0 top
C206  1e-05  [C0805]  -33.5,91.44 0 top  (outside the outline)
C207  1e-06  [C0603]  35.08,118.11 0 top  (outside the outline)
C208  1e-07  [C0402]  57.94,138.43 0 top  (outside the outline)
C209  6.8e-05  [2220]  37.62,68.58 0 top
C210  1e-08  [C0402]  54.13,138.43 0 top  (outside the outline)
C211  1e-05  [C1210]  5.87,85.09 0 top  (outside the outline)
C212  1e-05  [C1210]  -0.48,85.09 0 top  (outside the outline)
C213  1e-08  [C0402]  50.32,138.43 0 top  (outside the outline)
C214  1e-05  [C1210]  -6.83,85.09 0 top  (outside the outline)
C215  1e-05  [C1210]  -13.18,85.09 0 top  (outside the outline)
C216  8e-07  [R0603]  31.27,118.11 0 top  (outside the outline)
C217  1e-05  [C1210]  -19.53,85.09 0 top  (outside the outline)
C218  1e-07  [C0402]  46.51,138.43 0 top  (outside the outline)
C219  2.2e-06  [C0603]  31.27,113.03 0 top  (outside the outline)
C220  2.45e-08  [R0603]  -5.56,97.79 0 top  (outside the outline)
C221  2.8258362168397e-09  [R0603]  -43.66,91.44 0 top  (outside the outline)
C222  7.105e-09  [R0603]  50.32,97.79 0 top  (outside the outline)
C223  0.0001  [EXV-9H]  36.35,77.47 0 top
C224  0.0001  [EXV-9H]  24.92,77.47 0 top
C225  1e-08  [C0402]  42.7,138.43 0 top  (outside the outline)
C226  1e-08  [C0402]  38.89,138.43 0 top  (outside the outline)
C227  1e-08  [C0402]  35.08,138.43 0 top  (outside the outline)
I1  97.0  [R0603]  27.46,118.11 0 top  (outside the outline)
I2  1.5e-06  [IND_PM3316]  64.29,58.42 0 top
I3  2.5e-06  [DR1040]  -22.07,44.45 0 top  (outside the outline)
I4  3.8e-06  [DR1040]  -33.5,44.45 0 top  (outside the outline)
I5  3.3e-06  [WE-HCI_7030/7040/7050]  23.65,44.45 0 top
J1  PJ-037B  [PJ-037B_PACKAGE]  28.73,45.72 0 top
R1  4700.0  [R0603]  23.65,118.11 0 top  (outside the outline)
R2  4700.0  [R0603]  19.84,118.11 0 top  (outside the outline)
R3  4700.0  [R0603]  16.03,118.11 0 top  (outside the outline)
R4  4700.0  [R0603]  12.22,118.11 0 top  (outside the outline)
R5  2200.0  [R0603]  8.41,118.11 0 top  (outside the outline)
R6  2200.0  [R0603]  4.6,118.11 0 top  (outside the outline)
R7  2200.0  [R0603]  0.79,118.11 0 top  (outside the outline)
R8  2200.0  [R0603]  -3.02,118.11 0 top  (outside the outline)
R9  10000.0  [R0603]  -10.64,97.79 0 top  (outside the outline)
R10  10000.0  [R0603]  -15.72,97.79 0 top  (outside the outline)
R11  10000.0  [R0603]  -20.8,97.79 0 top  (outside the outline)
R12  10000.0  [R0603]  -25.88,97.79 0 top  (outside the outline)
R13  10000.0  [R0603]  -30.96,97.79 0 top  (outside the outline)
R14  49.9  [R0603]  -6.83,118.11 0 top  (outside the outline)
R15  49.9  [R0603]  -10.64,118.11 0 top  (outside the outline)
R16  0.1  [R0603]  -14.45,118.11 0 top  (outside the outline)
R17  10000.0  [R0603]  -36.04,97.79 0 top  (outside the outline)
R18  10000.0  [R0603]  -41.12,97.79 0 top  (outside the outline)
R19  10000.0  [R0603]  69.37,102.87 0 top  (outside the outline)
R20  10000.0  [R0603]  64.29,102.87 0 top  (outside the outline)
R21  10000.0  [R0603]  59.21,102.87 0 top  (outside the outline)
R22  10000.0  [R0603]  54.13,102.87 0 top  (outside the outline)
R23  10000.0  [R0603]  49.05,102.87 0 top  (outside the outline)
R24  10000.0  [R0603]  43.97,102.87 0 top  (outside the outline)
R25  10000.0  [R0603]  38.89,102.87 0 top  (outside the outline)
R26  10000.0  [R0603]  33.81,102.87 0 top  (outside the outline)
R27  10000.0  [R0603]  28.73,102.87 0 top  (outside the outline)
R28  2700.0  [R0603]  -18.26,118.11 0 top  (outside the outline)
R29  2700.0  [R0603]  -22.07,118.11 0 top  (outside the outline)
R30  4700.0  [R0603]  -25.88,118.11 0 top  (outside the outline)
R31  10000.0  [R0603]  23.65,102.87 0 top  (outside the outline)
R32  10000.0  [R0603]  18.57,102.87 0 top  (outside the outline)
R33  10000.0  [R0603]  13.49,102.87 0 top  (outside the outline)
R34  470.0  [R0603]  -29.69,118.11 0 top  (outside the outline)
R35  470.0  [R0603]  -33.5,118.11 0 top  (outside the outline)
R36  10000.0  [R0603]  8.41,102.87 0 top  (outside the outline)
R37  10000.0  [R0603]  3.33,102.87 0 top  (outside the outline)
R38  10000.0  [R0603]  -1.75,102.87 0 top  (outside the outline)
R39  11000.0  [R0603]  -6.83,102.87 0 top  (outside the outline)
R40  6040.0  [R0603]  -37.31,118.11 0 top  (outside the outline)
R41  2490.0  [R0603]  -41.12,118.11 0 top  (outside the outline)
R42  6040.0  [R0603]  -44.93,118.11 0 top  (outside the outline)
R43  2490.0  [R0603]  69.37,123.19 0 top  (outside the outline)
R44  6040.0  [R0603]  65.56,123.19 0 top  (outside the outline)
R45  2490.0  [R0603]  61.75,123.19 0 top  (outside the outline)
R46  11000.0  [R0603]  -11.91,102.87 0 top  (outside the outline)
R47  2490.0  [R0603]  57.94,123.19 0 top  (outside the outline)
R48  6040.0  [R0603]  54.13,123.19 0 top  (outside the outline)
R49  2490.0  [R0603]  50.32,123.19 0 top  (outside the outline)
R50  6040.0  [R0603]  46.51,123.19 0 top  (outside the outline)
R51  2490.0  [R0603]  42.7,123.19 0 top  (outside the outline)
R52  0.1  [R0603]  38.89,123.19 0 top  (outside the outline)
R53  0.1  [R0603]  35.08,123.19 0 top  (outside the outline)
R54  200.0  [R0603]  31.27,123.19 0 top  (outside the outline)
R55  200.0  [R0603]  27.46,123.19 0 top  (outside the outline)
R56  12100.0  [R0603]  -16.99,102.87 0 top  (outside the outline)
R57  49.9  [R0603]  23.65,123.19 0 top  (outside the outline)
R58  49.9  [R0603]  19.84,123.19 0 top  (outside the outline)
R59  49.9  [R0603]  16.03,123.19 0 top  (outside the outline)
R60  10000.0  [R0603]  -22.07,102.87 0 top  (outside the outline)
R61  49.9  [R0603]  12.22,123.19 0 top  (outside the outline)
R62  10000.0  [R0603]  -27.15,102.87 0 top  (outside the outline)
R63  10000.0  [R0603]  -32.23,102.87 0 top  (outside the outline)
R64  10000.0  [R0603]  -37.31,102.87 0 top  (outside the outline)
R65  10000.0  [R0603]  -42.39,102.87 0 top  (outside the outline)
R66  10000.0  [R0603]  69.37,107.95 0 top  (outside the outline)
R67  10000.0  [R0603]  64.29,107.95 0 top  (outside the outline)
R68  10000.0  [R0603]  59.21,107.95 0 top  (outside the outline)
R69  10000.0  [R0603]  54.13,107.95 0 top  (outside the outline)
R70  10000.0  [R0603]  49.05,107.95 0 top  (outside the outline)
R71  10000.0  [R0603]  43.97,107.95 0 top  (outside the outline)
R72  10000.0  [R0603]  38.89,107.95 0 top  (outside the outline)
R73  47000.0  [R0603]  33.81,107.95 0 top  (outside the outline)
R74  47000.0  [R0603]  28.73,107.95 0 top  (outside the outline)
R75  47000.0  [R0603]  23.65,107.95 0 top  (outside the outline)
R76  680.0  [R0603]  8.41,123.19 0 top  (outside the outline)
R77  16472.392737441  [R0603]  65.56,97.79 0 top  (outside the outline)
R78  22000.0  [R0603]  18.57,107.95 0 top  (outside the outline)
R79  100000.0  [R0603]  45.24,97.79 0 top  (outside the outline)
R80  153694.38  [R0603]  60.48,97.79 0 top  (outside the outline)
R81  100000.0  [R0603]  40.16,97.79 0 top  (outside the outline)
R82  20000.0  [R0603]  13.49,107.95 0 top  (outside the outline)
R83  30000.0  [R0603]  8.41,107.95 0 top  (outside the outline)
R84  300000.0  [R0603]  35.08,97.79 0 top  (outside the outline)
R85  20000.0  [R0603]  3.33,107.95 0 top  (outside the outline)
R86  13000.0  [R0603]  -1.75,107.95 0 top  (outside the outline)
R87  300000.0  [R0603]  30,97.79 0 top  (outside the outline)
R88  20000.0  [R0603]  -6.83,107.95 0 top  (outside the outline)
R89  39000.0  [R0603]  -11.91,107.95 0 top  (outside the outline)
R90  300000.0  [R0603]  24.92,97.79 0 top  (outside the outline)
R91  100000.0  [R0603]  19.84,97.79 0 top  (outside the outline)
R92  1500.0  [R0603]  4.6,123.19 0 top  (outside the outline)
R93  1000.0  [R0603]  0.79,123.19 0 top  (outside the outline)
R94  100000.0  [R0603]  14.76,97.79 0 top  (outside the outline)
R95  2231.0  [R0603]  -3.02,123.19 0 top  (outside the outline)
R96  1000.0  [R0603]  -6.83,123.19 0 top  (outside the outline)
R97  100000.0  [R0603]  9.68,97.79 0 top  (outside the outline)
R98  153694.38  [R0603]  55.4,97.79 0 top  (outside the outline)
R99  100000.0  [R0603]  4.6,97.79 0 top  (outside the outline)
R100  10000.0  [R0603]  -16.99,107.95 0 top  (outside the outline)
R101  75000.0  [R0603]  -22.07,107.95 0 top  (outside the outline)
R102  10000.0  [R0603]  -27.15,107.95 0 top  (outside the outline)
R103  10000.0  [R0603]  -32.23,107.95 0 top  (outside the outline)
R104  95300.0  [R0603]  -37.31,107.95 0 top  (outside the outline)
R105  95300.0  [R0603]  -42.39,107.95 0 top  (outside the outline)
R106  95300.0  [R0603]  69.37,113.03 0 top  (outside the outline)
R107  95300.0  [R0603]  64.29,113.03 0 top  (outside the outline)
R108  10000.0  [R0603]  59.21,113.03 0 top  (outside the outline)
R109  10000.0  [R0603]  54.13,113.03 0 top  (outside the outline)
R110  10000.0  [R0603]  49.05,113.03 0 top  (outside the outline)
R111  10000.0  [R0603]  43.97,113.03 0 top  (outside the outline)
R112  10000.0  [R0603]  38.89,113.03 0 top  (outside the outline)
R113  110000.0  [R0603]  -0.48,97.79 0 top  (outside the outline)
U1  tms320dm8148SCYE2  [BFBGA-684]  21.11,12.7 0 top
U2  MD-40S  [MD-40S]  4.6,6.35 0 top
U3  AT25320B-SSHL-T  [SOIC-8]  30,58.42 0 top
U4  DP83867CSRGZT  [VFQFPN48]  -11.91,44.45 0 top  (outside the outline)
U5  7499511611A  [7499511611A]  61.75,25.4 0 top
U6  LAN8710AI-EZK  [QFN-32]  46.51,58.42 0 top
U7  7498011122R  [7498011122R]  42.7,7.62 0 top
U8  24AA1025T-I/SN  [SOIC-8]  14.76,58.42 0 top
U9  WM8731CLSEFL  [QFN-28]  45.24,85.09 0 top
U10  SJ-43515TS-SMT-TR  [SJ-43515TS-SMT-TR]  -29.69,10.16 0 top  (outside the outline)
U11  SJ-43515TS-SMT-TR  [SJ-43515TS-SMT-TR]  45.24,48.26 0 top
U12  ABLS-20.000MHZ-B4-T  [ABLS-20.000MHZ-B4-T]  -14.45,77.47 0 top  (outside the outline)
U13  ABLS-20.000MHZ-B4-T  [ABLS-20.000MHZ-B4-T]  -34.77,77.47 0 top  (outside the outline)
U14  ABLS-25.000MHZ-B2F-T  [ABLS-25.000MHZ-B2F-T]  5.87,77.47 0 top
U15  ASFL1-12.288MHZ-EC-T  [ASFL1]  54.13,77.47 0 top
U16  tps54525PWP  [HTSSOP14]  66.83,85.09 0 top  (outside the outline)
U17  LP2951ACSDX/NOPB  [WSON-8]  -22.07,66.04 0 top  (outside the outline)
U18  LTC3601EUD#PBF  [QFN-16_EP]  -11.91,123.19 0 top  (outside the outline)
U19  LTC3601EUD#PBF  [QFN-16_EP]  -18.26,123.19 0 top  (outside the outline)
U20  LTC3601EUD#PBF  [QFN-16_EP]  -24.61,123.19 0 top  (outside the outline)
U21  LP3878SDX-ADJ/NOPB  [WSON-8]  16.03,66.04 0 top
U22  LP3878SDX-ADJ/NOPB  [WSON-8]  -4.29,66.04 0 top
U23  LP2951ACSDX/NOPB  [WSON-8]  -39.85,66.04 0 top  (outside the outline)
U24  LTC2928CUHF#PBF  [QFN-38_UHF]  46.51,77.47 0 top
U25  IRF8306MTRPbF  [IRF8306MTRPBF]  -3.02,59.69 0 top
U26  IRF8306MTRPbF  [IRF8306MTRPBF]  -18.26,59.69 0 top  (outside the outline)
U27  IRF8306MTRPbF  [IRF8306MTRPBF]  -33.5,59.69 0 top  (outside the outline)
U28  IRF8306MTRPbF  [IRF8306MTRPBF]  57.94,69.85 0 top
U29  4-1437565-2  [SW_4-1437565-2]  4.6,44.45 0 top
U30  Q65110A2395  [LGM67K-G1J2-24-Z]  57.94,85.09 0 top  (outside the outline)
U31  nc7sz125m5x  [NC7SZ125M5X]  -37.31,83.82 0 top  (outside the outline)
U32  nc7sz125m5x  [NC7SZ125M5X]  -43.66,83.82 0 top  (outside the outline)
U33  nc7sz125m5x  [NC7SZ125M5X]  69.37,91.44 0 top  (outside the outline)

## Library data of the parts
C1-C227 I1-I5 J1 R1-R113 U1-U33 = circuit_tree

## Nets
CLK_CRYSTAL_U1_AH2: C1.1 U1.AH2 U12.1
CLK_CRYSTAL_U1_AH3: C2.1 U1.AH3 U12.2
CLK_CRYSTAL_U1_R1: C3.1 U1.R1 U13.1
CLK_CRYSTAL_U1_T1: C4.1 U1.T1 U13.2
CLK_CRYSTAL_U4_14: C166.1 U4.14 U14.2
CLK_CRYSTAL_U4_15: C167.1 U4.15 U14.1
CLK_U9_1: U9.1 U15.3
GND: C1.2 C2.2 C3.2 C4.2 C5.2 C6.2 C7.2 C8.2 C9.2 C10.2 C11.2 C12.2 C13.2 C14.2 C15.2 C16.2 C17.2 C18.2 C19.2 C20.2 C21.2 C22.2 C23.2 C24.2 C25.2 C26.2 C27.2 C28.2 C29.2 C30.2 C31.2 C32.2 C33.2 C34.2 C35.2 C36.2 C37.2 C38.2 C39.2 C40.2 C41.2 C42.2 C43.2 C44.2 C45.2 C46.2 C47.2 C48.2 C49.2 C50.2 C51.2 C52.2 C53.2 C54.2 C55.2 C56.2 C57.2 C58.2 C59.2 C60.2 C61.2 C62.2 C63.2 C64.2 C65.2 C66.2 C67.2 C68.2 C69.2 C70.2 C71.2 C72.2 C73.2 C74.2 C75.2 C76.2 C77.2 C78.2 C79.2 C80.2 C81.2 C82.2 C83.2 C84.2 C85.2 C86.2 C87.2 C88.2 C89.2 C90.2 C91.2 C92.2 C93.2 C94.2 C95.2 C96.2 C97.2 C98.2 C99.2 C100.2 C101.2 C102.2 C103.2 C104.2 C105.2 C106.2 C107.2 C108.2 C109.2 C110.2 C111.2 C112.2 C113.2 C114.2 C115.2 C116.2 C117.2 C118.2 C119.2 C120.2 C121.2 C122.2 C123.2 C124.2 C125.2 C126.2 C127.2 C128.2 C129.2 C130.2 C131.2 C132.2 C133.2 C134.2 C135.2 C136.2 C137.2 C138.2 C139.2 C140.2 C141.2 C142.2 C143.2 C144.2 C145.2 C146.2 C147.2 C148.2 C149.2 C150.2 C151.2 C152.2 C153.2 C154.2 C155.2 C156.2 C157.2 C158.2 C159.2 C160.2 C161.2 C162.2 C163.2 C164.2 C165.2 C166.2 C167.2 C168.2 C169.2 C170.2 C171.2 C172.2 C173.2 C177.2 C178.2 C179.2 C180.2 C181.2 C182.2 C183.2 C184.2 C185.2 C186.2 C187.2 C188.2 C189.2 C190.2 C192.2 C193.2 C194.2 C195.2 C196.2 C197.2 C198.2 C199.2 C201.1 C201.2 C202.2 C203.2 C205.1 C205.2 C206.2 C207.2 C209.1 C209.2 C210.2 C211.2 C212.2 C213.2 C214.2 C215.2 C216.2 C217.2 C218.2 C219.2 C220.2 C221.2 C222.2 C223.2 C224.2 C225.2 C226.2 C227.2 J1.2 R9.2 R10.2 R11.2 R14.2 R15.2 R16.2 R17.2 R18.2 R19.2 R22.2 R23.2 R25.2 R27.2 R30.2 R37.2 R38.2 R39.2 R41.2 R43.2 R45.2 R47.2 R49.2 R51.2 R52.2 R53.2 R54.2 R56.2 R62.2 R69.2 R71.2 R73.2 R74.2 R75.2 R78.2 R81.2 R82.2 R84.2 R85.2 R87.2 R88.2 R90.2 R93.2 R96.2 R99.2 R101.2 R104.2 R105.2 R106.2 R107.2 R108.2 R109.2 R110.2 R111.2 R112.2 U1.A1 U1.A12 U1.A17 U1.A28 U1.AA14 U1.AA16 U1.AA19 U1.AD21 U1.AE1 U1.AE2 U1.AE9 U1.AE20 U1.AF23 U1.AG1 U1.AG3 U1.AH1 U1.AH28 U1.D9 U1.D20 U1.E8 U1.E20 U1.J12 U1.J14 U1.J19 U1.K10 U1.K11 U1.K13 U1.K14 U1.K15 U1.K16 U1.K17 U1.K19 U1.L8 U1.L13 U1.L14 U1.L16 U1.L22 U1.M9 U1.M15 U1.M17 U1.M19 U1.M21 U1.N8 U1.N12 U1.N15 U1.N16 U1.N20 U1.N21 U1.N22 U1.P13 U1.P15 U1.P17 U1.P19 U1.P21 U1.R2 U1.R8 U1.R9 U1.R10 U1.R12 U1.R14 U1.R16 U1.R21 U1.R22 U1.T8 U1.T9 U1.T13 U1.T14 U1.T17 U1.T18 U1.T19 U1.T21 U1.T22 U1.U12 U1.U14 U1.U18 U1.U20 U1.V7 U1.V9 U1.V11 U1.V12 U1.V13 U1.V17 U1.V18 U1.V19 U1.V21 U1.W12 U1.W16 U1.W17 U1.Y1 U1.Y2 U1.Y10 U1.Y12 U1.Y15 U1.Y17 U1.Y18 U1.Y19 U2.1 U2.2 U3.4 U4.EXP U5.17 U5.20 U5.Z1 U5.Z2 U6.24 U6.25 U6.EXP U7.10 U8.4 U8.7 U9.4 U9.15 U9.19 U9.25 U9.26 U9.29 U10.1 U11.1 U15.2 U16.5 U16.8 U16.9 U16.15 U17.3 U17.4 U17.PAD U18.1 U18.9 U18.17 U19.1 U19.9 U19.17 U20.1 U20.9 U20.17 U21.3 U21.PAD U22.3 U22.PAD U23.3 U23.4 U23.PAD U24.10 U24.12 U24.13 U24.24 U24.25 U24.39 U31.1 U31.3 U32.1 U32.3 U33.1 U33.3
NET_U1_AA4: R4.1
NET_U1_AA15: U1.AA15 U1.AA17 U1.AB14 U1.AB16 U1.M8 U1.N7 U1.P8 U1.T7 U1.U21 U1.U22 U1.V20 U1.Y11 U1.Y16
NET_U1_AA27: R12.1 U1.AA27
NET_U1_AA28: R11.1 U1.AA28
NET_U1_AB6: R6.1 U1.AB6 U8.5
NET_U1_AB27: R16.1 U1.AB27
NET_U1_AB28: R22.1 U1.AB28
NET_U1_AC4: R5.1 U1.AC4 U8.6
NET_U1_AG22: R29.2 U1.AG22
NET_U1_AG23: R28.2 U1.AG23
NET_U1_AH23: R30.1 U1.AH23
NET_U1_B1: R15.1 U1.B1
NET_U1_B27: R14.1 U1.B27
NET_U1_G14: C7.1 C8.1 U1.G14
NET_U1_G15: C5.1 C6.1 U1.G15
NET_U1_H28: R7.1 U1.H28 U4.16 U6.17
NET_U1_J5: R3.1 U1.J5 U33.4
NET_U1_K12: U1.K9 U1.K12 U1.K18 U1.L15 U1.L17 U1.L19 U1.M16 U1.M18 U1.N17 U1.N19 U1.P12 U1.P14 U1.P16 U1.R15 U1.R17 U1.R19 U1.T12 U1.U11 U1.U13 U1.U17 U1.U19 U1.W11
NET_U1_L18: C13.1 U1.L18
NET_U1_L20: U1.L20
NET_U1_M11: C15.1 U1.M11
NET_U1_N10: C16.1 U1.N10
NET_U1_N11: C17.1 U1.N11
NET_U1_P10: C14.1 U1.P10
NET_U1_P18: C11.1 U1.P18
NET_U1_P24: R8.1 U1.P24 U4.17 U6.16
NET_U1_R11: C12.1 U1.R11
NET_U1_T10: C18.1 U1.T10
NET_U1_T11: C19.1 U1.T11
NET_U1_U10: U1.U9 U1.U10
NET_U1_U23: R27.1 U1.U23
NET_U1_U24: R25.1 U1.U24
NET_U1_U25: R10.1 U1.U25
NET_U1_U26: R17.1 U1.U26
NET_U1_V14: C10.1 U1.V14
NET_U1_V24: R26.1 U1.V24
NET_U1_V25: R9.1 U1.V25
NET_U1_V26: R21.1 U1.V26
NET_U1_V27: R19.1 U1.V27
NET_U1_W10: U1.W9 U1.W10
NET_U1_W14: C9.1 U1.W14
NET_U1_W19: U1.W19 U1.W20
NET_U1_W27: R20.1 U1.W27
NET_U1_Y25: R13.1 U1.Y25
NET_U1_Y26: R24.1 U1.Y26
NET_U1_Y27: R23.1 U1.Y27
NET_U1_Y28: R18.1 U1.Y28
NET_U2_3: R28.1 U1.AH24 U2.3
NET_U2_4: R29.1 U1.AH22 U2.4
NET_U3_3: R31.1 U3.3
NET_U3_7: R33.1 U3.7
NET_U4_12: R39.1 U4.12
NET_U4_18: R37.1 U4.18
NET_U4_20: R38.1 U4.20
NET_U4_40: R50.1 R51.1 U4.40
NET_U4_43: R1.1 U4.43 U31.4
NET_U4_44: R36.1 U4.44
NET_U4_45: R35.2 R48.1 R49.1 U4.45
NET_U4_46: R44.1 R45.1 U4.46
NET_U5_1: U5.1
NET_U5_2: U4.8 U5.2
NET_U5_3: U4.7 U5.3
NET_U5_4: U4.4 U5.4
NET_U5_5: U4.5 U5.5
NET_U5_6: C135.1 U5.1 U5.6 U5.7 U5.12
NET_U5_7: U5.7
NET_U5_8: U4.10 U5.8
NET_U5_9: U4.11 U5.9
NET_U5_10: U4.2 U5.10
NET_U5_11: U4.1 U5.11
NET_U5_18: R34.1 U5.18
NET_U5_19: R35.1 U5.19
NET_U5_45: R35.2
NET_U5_47: R34.2
NET_U6_1: C169.1 I1.1 R57.2 R58.2 R59.2 R61.2 U6.1 U6.27
NET_U6_6: C170.1 C171.1 U6.6
NET_U6_7: R68.1 U6.7
NET_U6_8: R69.1 U6.8
NET_U6_9: R62.1 R63.1 U6.9
NET_U6_18: R60.1 U6.18
NET_U6_19: R2.1 U6.19 U32.4
NET_U6_32: R56.1 U6.32
NET_U7_1: R57.1 U6.29 U7.1
NET_U7_3: R55.2 R58.1 U6.28 U7.3
NET_U7_4: R59.1 U6.31 U7.4
NET_U7_5: C168.1 U7.2 U7.5
NET_U7_6: R61.1 U6.30 U7.6
NET_U7_8: R53.1 U7.8
NET_U7_9: R55.1 U7.9
NET_U7_11: U6.2 U7.11
NET_U7_12: R54.1 U7.12
NET_U7_13: R52.1 U7.13 U7.14
NET_U8_1: R71.1 U8.1
NET_U8_2: R72.1 U8.2
NET_U8_3: R70.1 U8.3
NET_U9_9: U9.9
NET_U9_20: C182.1 C187.1 U9.20
NET_U10_2: C175.1 R74.1 U10.2
NET_U10_5: C174.1 R73.1 U10.5
NET_U10_13: C174.2
NET_U10_14: C175.2
NET_U11_5: C176.1 C177.1 R75.1 R76.1 U11.5
NET_U11_21: R76.2
NET_U11_22: C176.2
NET_U16_2: R77.2 R78.1 U16.2
NET_U16_3: C189.1 U16.3
NET_U16_4: C190.1 U16.4
NET_U16_10: C191.1 I2.1 U16.10 U16.11
NET_U16_12: C191.2 U16.12
NET_U17_5: R79.1 U17.5
NET_U17_7: R80.2 R81.1 U17.7
NET_U18_3: C200.2 I3.1 U18.3 U18.4
NET_U18_6: C200.1 U18.6
NET_U18_7: C199.1 U18.7 U18.12
NET_U18_10: R84.1 U18.10
NET_U18_11: R82.1 R83.1 U18.11
NET_U18_14: U18.14
NET_U18_ATNET_3: I3.2 R83.2
NET_U19_3: C204.2 I4.1 U19.3 U19.4
NET_U19_6: C204.1 U19.6
NET_U19_7: C203.1 U19.7 U19.12
NET_U19_10: R87.1 U19.10
NET_U19_11: R85.1 R86.1 U19.11
NET_U19_14: U19.14
NET_U19_ATNET_3: I4.2 R86.2
NET_U20_3: C208.2 I5.1 U20.3 U20.4
NET_U20_6: C208.1 U20.6
NET_U20_7: C207.1 U20.7 U20.12
NET_U20_10: R90.1 U20.10
NET_U20_11: R88.1 R89.1 U20.11
NET_U20_14: U20.14
NET_U20_ATNET_3: I5.2 R89.2
NET_U21_1: C210.1 U21.1
NET_U21_6: R92.2 R93.1 U21.6
NET_U21_8: R91.1 U21.8
NET_U22_1: C213.1 U22.1
NET_U22_6: R95.2 R96.1 U22.6
NET_U22_8: R94.1 U22.8
NET_U23_5: R97.1 U23.5
NET_U23_7: R98.2 R99.1 U23.7
NET_U24_3: R109.1 U24.3
NET_U24_6: R104.1 U24.6
NET_U24_7: R105.1 U24.7
NET_U24_8: R106.1 U24.8
NET_U24_9: R107.1 U24.9
NET_U24_16: R108.1 R113.1 U24.16
NET_U24_18: R103.1 U24.18
NET_U24_19: R102.1 U24.19 U24.20
NET_U24_21: R100.1 R101.1 U24.21 U31.2 U32.2 U33.2
NET_U24_22: C218.1 R100.2 R102.2 R103.2 U24.11 U24.22
NET_U24_26: C221.1 U24.26
NET_U24_27: C220.1 U24.27
NET_U24_28: C222.1 U24.28
NET_U24_30: R112.1 U24.30
NET_U24_32: R111.1 U24.32
NET_U24_38: R110.1 U24.38
NET_U25_3: U24.2 U25.3
NET_U26_3: U24.37 U26.3
NET_U27_3: U24.31 U27.3
NET_U28_3: U24.29 U28.3
NET_U29_1: U29.1 U29.2
NET_U29_3: U29.3 U29.4
PROC_EMAC0_RGRXC: U1.L24 U4.32
PROC_EMAC0_RGRXCTL: R46.1 R47.1 U1.L23 U4.38
PROC_EMAC0_RGRXD0: R40.1 R41.1 U1.P23 U4.33
PROC_EMAC0_RGRXD1: R42.1 R43.1 U1.R23 U4.34
PROC_EMAC0_RGRXD2: U1.R25 U4.35
PROC_EMAC0_RGRXD3: U1.T23 U4.36
PROC_EMAC0_RGTXC: U1.H27 U4.29
PROC_EMAC0_RGTXCTL: U1.J26 U4.37
PROC_EMAC0_RGTXD0: U1.G28 U4.28
PROC_EMAC0_RGTXD1: U1.G27 U4.27
PROC_EMAC0_RGTXD2: U1.F28 U4.26
PROC_EMAC0_RGTXD3: U1.H26 U4.25
PROC_EMAC1_RMCRSDV: R66.1 U1.AC17 U6.15
PROC_EMAC1_RMRXD0: R64.1 U1.H22 U6.11
PROC_EMAC1_RMRXD1: R65.1 U1.AF20 U6.10
PROC_EMAC1_RMRXER: R67.1 U1.AB21 U6.13
PROC_EMAC1_RMTXD0: U1.AE18 U6.22
PROC_EMAC1_RMTXD1: U1.AC21 U6.23
PROC_EMAC1_RMTXEN: U1.AC16 U6.21
PROC_MCA0_ACLKX: U1.R4 U9.7
PROC_MCA0_AFSX: U1.L3 U9.9 U9.11
PROC_MCA0_AXR7: U1.L2 U9.10
PROC_MCA0_AXR8: U1.L1 U9.8
PROC_SPI0_D0: U1.AE3 U3.5
PROC_SPI0_D1: U1.AF3 U3.2
PROC_SPI0_SCLK: U1.AC7 U3.6
PROC_SPI0_SCS0: R32.1 U1.AD6 U3.1
VCC_13V3: C219.1 C223.1 C224.1 J1.1 R113.2 U24.23 U25.1 U25.2 U25.6 U25.7 U26.1 U26.2 U26.6 U26.7 U27.1 U27.2 U27.6 U27.7 U28.1 U28.2 U28.6 U28.7
VCC_S1_13V3: C194.1 C195.1 C196.1 U16.7 U16.13 U16.14 U17.8 U25.4 U25.5
VCC_S2_13V3: C198.1 U18.15 U18.16 U26.4 U26.5
VCC_S3_13V3: C202.1 C206.1 C211.1 C214.1 R91.2 R94.2 U19.15 U19.16 U20.15 U20.16 U21.4 U22.4 U27.4 U27.5
VCC_S4_13V3: C216.1 U23.8 U28.4 U28.5
VCC_TIER1_1V35: C41.1 C42.1 C43.1 C44.1 C45.1 C46.1 C47.1 C48.1 C49.1 C50.1 C51.1 C52.1 C53.1 C54.1 C55.1 C56.1 C57.1 C58.1 C59.1 C60.1 C61.1 C62.1 C63.1 C64.1 C65.1 C66.1 C67.1 C68.1 C69.1 C70.1 C71.1 C72.1 C73.1 C74.1 C75.1 C76.1 C77.1 C78.1 C79.1 C80.1 C81.1 C82.1 C83.1 C84.1 C85.1 C86.1 C192.1 C193.1 I2.2 R77.1 U1.K9 U1.K10 U1.L9 U1.L10 U1.L11 U1.L12 U1.L14 U1.L15 U1.M10 U1.M12 U1.M13 U1.M14 U1.N9 U1.N13 U1.N14 U1.T14 U1.T15 U1.T16 U1.U15 U1.U16 U1.V15 U1.V16 U16.1
VCC_TIER1_3V3: C188.1 C197.1 C225.1 C226.1 C227.1 R79.2 R80.1 U15.4 U17.1 U31.5 U32.5 U33.5
VCC_TIER2_1V5: C87.1 C88.1 C89.1 C90.1 C91.1 C92.1 C93.1 C94.1 C95.1 C96.1 C97.1 C98.1 C99.1 C100.1 C101.1 C102.1 C103.1 C104.1 C105.1 C106.1 C107.1 C108.1 C201.2 I3.2 R83.2 U1.E8 U1.E9 U1.E20 U1.E21 U1.G13 U1.G16 U1.H12 U1.H13 U1.H14 U1.H16 U1.H17 U1.J10 U1.J11 U1.J13 U1.J15 U1.J16 U1.J17 U1.J18 U18.8
VCC_TIER3_1V0: C150.1 C151.1 C152.1 C153.1 C154.1 C155.1 C156.1 C157.1 C158.1 C159.1 C205.2 I4.2 R86.2 U4.6 U4.24 U4.31 U4.42 U19.8
VCC_TIER3_1V8: C20.1 C21.1 C22.1 C23.1 C24.1 C25.1 C26.1 C27.1 C28.1 C29.1 C30.1 C31.1 C32.1 C33.1 C34.1 C35.1 C36.1 C37.1 C38.1 C39.1 C109.1 C110.1 C111.1 C112.1 C113.1 C114.1 C115.1 C116.1 C117.1 C118.1 C119.1 C120.1 C121.1 C122.1 C123.1 C124.1 C125.1 C126.1 C127.1 C128.1 C129.1 C130.1 C131.1 C132.1 C133.1 C134.1 C136.1 C137.1 C138.1 C139.1 C140.1 C141.1 C142.1 C143.1 C160.1 C161.1 C162.1 C163.1 C164.1 C165.1 C172.1 C173.1 C178.1 C179.1 C180.1 C181.1 C183.1 C184.1 C185.1 C186.1 C209.2 I5.2 R1.2 R2.2 R3.2 R4.2 R5.2 R6.2 R7.2 R8.2 R12.2 R13.2 R20.2 R21.2 R24.2 R26.2 R31.2 R32.2 R33.2 R36.2 R40.2 R42.2 R44.2 R46.2 R48.2 R50.2 R60.2 R63.2 R64.2 R65.2 R66.2 R67.2 R68.2 R70.2 R72.2 R89.2 U1.AA12 U1.AA18 U1.AB18 U1.AB19 U1.H15 U1.K20 U1.L20 U1.L21 U1.M7 U1.M8 U1.M20 U1.M22 U1.N7 U1.N18 U1.P7 U1.P9 U1.P11 U1.P20 U1.R10 U1.R13 U1.R18 U1.R20 U1.T20 U1.U7 U1.U9 U1.V10 U1.W9 U1.W13 U1.W15 U1.W18 U1.Y13 U3.8 U4.13 U4.19 U4.30 U4.41 U4.48 U6.12 U8.8 U9.3 U9.5 U9.12 U9.18 U20.8
VCC_TIER3_2V5: C144.1 C145.1 C146.1 C147.1 C148.1 C149.1 C212.1 R92.1 U4.3 U4.9 U21.5
VCC_TIER3_3V3: C215.1 I1.2 R95.1 U22.5
VCC_TIER4_3V3: C40.1 C217.1 R97.2 R98.1 U1.AA13 U23.1

## Tracks (layer width: path | path; a pad name or v marks a point on that pad's centre or on a via)
CLK_CRYSTAL_U1_AH2  (2 unrouted)
CLK_CRYSTAL_U1_AH3  (2 unrouted)
CLK_CRYSTAL_U1_R1  (2 unrouted)
CLK_CRYSTAL_U1_T1  (2 unrouted)
CLK_CRYSTAL_U4_14  (2 unrouted)
CLK_CRYSTAL_U4_15  (2 unrouted)
CLK_U9_1  (1 unrouted)
GND  (431 unrouted)
NET_U1_AA15  (12 unrouted)
NET_U1_AA27  (1 unrouted)
NET_U1_AA28  (1 unrouted)
NET_U1_AB6  (2 unrouted)
NET_U1_AB27  (1 unrouted)
NET_U1_AB28  (1 unrouted)
NET_U1_AC4  (2 unrouted)
NET_U1_AG22  (1 unrouted)
NET_U1_AG23  (1 unrouted)
NET_U1_AH23  (1 unrouted)
NET_U1_B1  (1 unrouted)
NET_U1_B27  (1 unrouted)
NET_U1_G14  (2 unrouted)
NET_U1_G15  (2 unrouted)
NET_U1_H28  (3 unrouted)
NET_U1_J5  (2 unrouted)
NET_U1_K12  (21 unrouted)
NET_U1_L18  (1 unrouted)
NET_U1_M11  (1 unrouted)
NET_U1_N10  (1 unrouted)
NET_U1_N11  (1 unrouted)
NET_U1_P10  (1 unrouted)
NET_U1_P18  (1 unrouted)
NET_U1_P24  (3 unrouted)
NET_U1_R11  (1 unrouted)
NET_U1_T10  (1 unrouted)
NET_U1_T11  (1 unrouted)
NET_U1_U10  (1 unrouted)
NET_U1_U23  (1 unrouted)
NET_U1_U24  (1 unrouted)
NET_U1_U25  (1 unrouted)
NET_U1_U26  (1 unrouted)
NET_U1_V14  (1 unrouted)
NET_U1_V24  (1 unrouted)
NET_U1_V25  (1 unrouted)
NET_U1_V26  (1 unrouted)
NET_U1_V27  (1 unrouted)
NET_U1_W10  (1 unrouted)
NET_U1_W14  (1 unrouted)
NET_U1_W19  (1 unrouted)
NET_U1_W27  (1 unrouted)
NET_U1_Y25  (1 unrouted)
NET_U1_Y26  (1 unrouted)
NET_U1_Y27  (1 unrouted)
NET_U1_Y28  (1 unrouted)
NET_U2_3  (2 unrouted)
NET_U2_4  (2 unrouted)
NET_U3_3  (1 unrouted)
NET_U3_7  (1 unrouted)
NET_U4_12  (1 unrouted)
NET_U4_18  (1 unrouted)
NET_U4_20  (1 unrouted)
NET_U4_40  (2 unrouted)
NET_U4_43  (2 unrouted)
NET_U4_44  (1 unrouted)
NET_U4_45  (3 unrouted)
NET_U4_46  (2 unrouted)
NET_U5_2  (1 unrouted)
NET_U5_3  (1 unrouted)
NET_U5_4  (1 unrouted)
NET_U5_5  (1 unrouted)
NET_U5_6  (4 unrouted)
NET_U5_8  (1 unrouted)
NET_U5_9  (1 unrouted)
NET_U5_10  (1 unrouted)
NET_U5_11  (1 unrouted)
NET_U5_18  (1 unrouted)
NET_U5_19  (1 unrouted)
NET_U6_1  (7 unrouted)
NET_U6_6  (2 unrouted)
NET_U6_7  (1 unrouted)
NET_U6_8  (1 unrouted)
NET_U6_9  (2 unrouted)
NET_U6_18  (1 unrouted)
NET_U6_19  (2 unrouted)
NET_U6_32  (1 unrouted)
NET_U7_1  (2 unrouted)
NET_U7_3  (3 unrouted)
NET_U7_4  (2 unrouted)
NET_U7_5  (2 unrouted)
NET_U7_6  (2 unrouted)
NET_U7_8  (1 unrouted)
NET_U7_9  (1 unrouted)
NET_U7_11  (1 unrouted)
NET_U7_12  (1 unrouted)
NET_U7_13  (2 unrouted)
NET_U8_1  (1 unrouted)
NET_U8_2  (1 unrouted)
NET_U8_3  (1 unrouted)
NET_U9_20  (2 unrouted)
NET_U10_2  (2 unrouted)
NET_U10_5  (2 unrouted)
NET_U11_5  (4 unrouted)
NET_U16_2  (2 unrouted)
NET_U16_3  (1 unrouted)
NET_U16_4  (1 unrouted)
NET_U16_10  (3 unrouted)
NET_U16_12  (1 unrouted)
NET_U17_5  (1 unrouted)
NET_U17_7  (2 unrouted)
NET_U18_3  (3 unrouted)
NET_U18_6  (1 unrouted)
NET_U18_7  (2 unrouted)
NET_U18_10  (1 unrouted)
NET_U18_11  (2 unrouted)
NET_U18_ATNET_3  (1 unrouted)
NET_U19_3  (3 unrouted)
NET_U19_6  (1 unrouted)
NET_U19_7  (2 unrouted)
NET_U19_10  (1 unrouted)
NET_U19_11  (2 unrouted)
NET_U19_ATNET_3  (1 unrouted)
NET_U20_3  (3 unrouted)
NET_U20_6  (1 unrouted)
NET_U20_7  (2 unrouted)
NET_U20_10  (1 unrouted)
NET_U20_11  (2 unrouted)
NET_U20_ATNET_3  (1 unrouted)
NET_U21_1  (1 unrouted)
NET_U21_6  (2 unrouted)
NET_U21_8  (1 unrouted)
NET_U22_1  (1 unrouted)
NET_U22_6  (2 unrouted)
NET_U22_8  (1 unrouted)
NET_U23_5  (1 unrouted)
NET_U23_7  (2 unrouted)
NET_U24_3  (1 unrouted)
NET_U24_6  (1 unrouted)
NET_U24_7  (1 unrouted)
NET_U24_8  (1 unrouted)
NET_U24_9  (1 unrouted)
NET_U24_16  (2 unrouted)
NET_U24_18  (1 unrouted)
NET_U24_19  (2 unrouted)
NET_U24_21  (5 unrouted)
NET_U24_22  (5 unrouted)
NET_U24_26  (1 unrouted)
NET_U24_27  (1 unrouted)
NET_U24_28  (1 unrouted)
NET_U24_30  (1 unrouted)
NET_U24_32  (1 unrouted)
NET_U24_38  (1 unrouted)
NET_U25_3  (1 unrouted)
NET_U26_3  (1 unrouted)
NET_U27_3  (1 unrouted)
NET_U28_3  (1 unrouted)
NET_U29_1  (1 unrouted)
NET_U29_3  (1 unrouted)
PROC_EMAC0_RGRXC  (1 unrouted)
PROC_EMAC0_RGRXCTL  (3 unrouted)
PROC_EMAC0_RGRXD0  (3 unrouted)
PROC_EMAC0_RGRXD1  (3 unrouted)
PROC_EMAC0_RGRXD2  (1 unrouted)
PROC_EMAC0_RGRXD3  (1 unrouted)
PROC_EMAC0_RGTXC  (1 unrouted)
PROC_EMAC0_RGTXCTL  (1 unrouted)
PROC_EMAC0_RGTXD0  (1 unrouted)
PROC_EMAC0_RGTXD1  (1 unrouted)
PROC_EMAC0_RGTXD2  (1 unrouted)
PROC_EMAC0_RGTXD3  (1 unrouted)
PROC_EMAC1_RMCRSDV  (2 unrouted)
PROC_EMAC1_RMRXD0  (2 unrouted)
PROC_EMAC1_RMRXD1  (2 unrouted)
PROC_EMAC1_RMRXER  (2 unrouted)
PROC_EMAC1_RMTXD0  (1 unrouted)
PROC_EMAC1_RMTXD1  (1 unrouted)
PROC_EMAC1_RMTXEN  (1 unrouted)
PROC_MCA0_ACLKX  (1 unrouted)
PROC_MCA0_AFSX  (2 unrouted)
PROC_MCA0_AXR7  (1 unrouted)
PROC_MCA0_AXR8  (1 unrouted)
PROC_SPI0_D0  (1 unrouted)
PROC_SPI0_D1  (1 unrouted)
PROC_SPI0_SCLK  (1 unrouted)
PROC_SPI0_SCS0  (2 unrouted)
VCC_13V3  (21 unrouted)
VCC_S1_13V3  (8 unrouted)
VCC_S2_13V3  (4 unrouted)
VCC_S3_13V3  (13 unrouted)
VCC_S4_13V3  (3 unrouted)
VCC_TIER1_1V35  (72 unrouted)
VCC_TIER1_3V3  (11 unrouted)
VCC_TIER2_1V5  (43 unrouted)
VCC_TIER3_1V0  (17 unrouted)
VCC_TIER3_1V8  (149 unrouted)
VCC_TIER3_2V5  (10 unrouted)
VCC_TIER3_3V3  (3 unrouted)
VCC_TIER4_3V3  (5 unrouted)